# Allegro board 7_31EX.brd
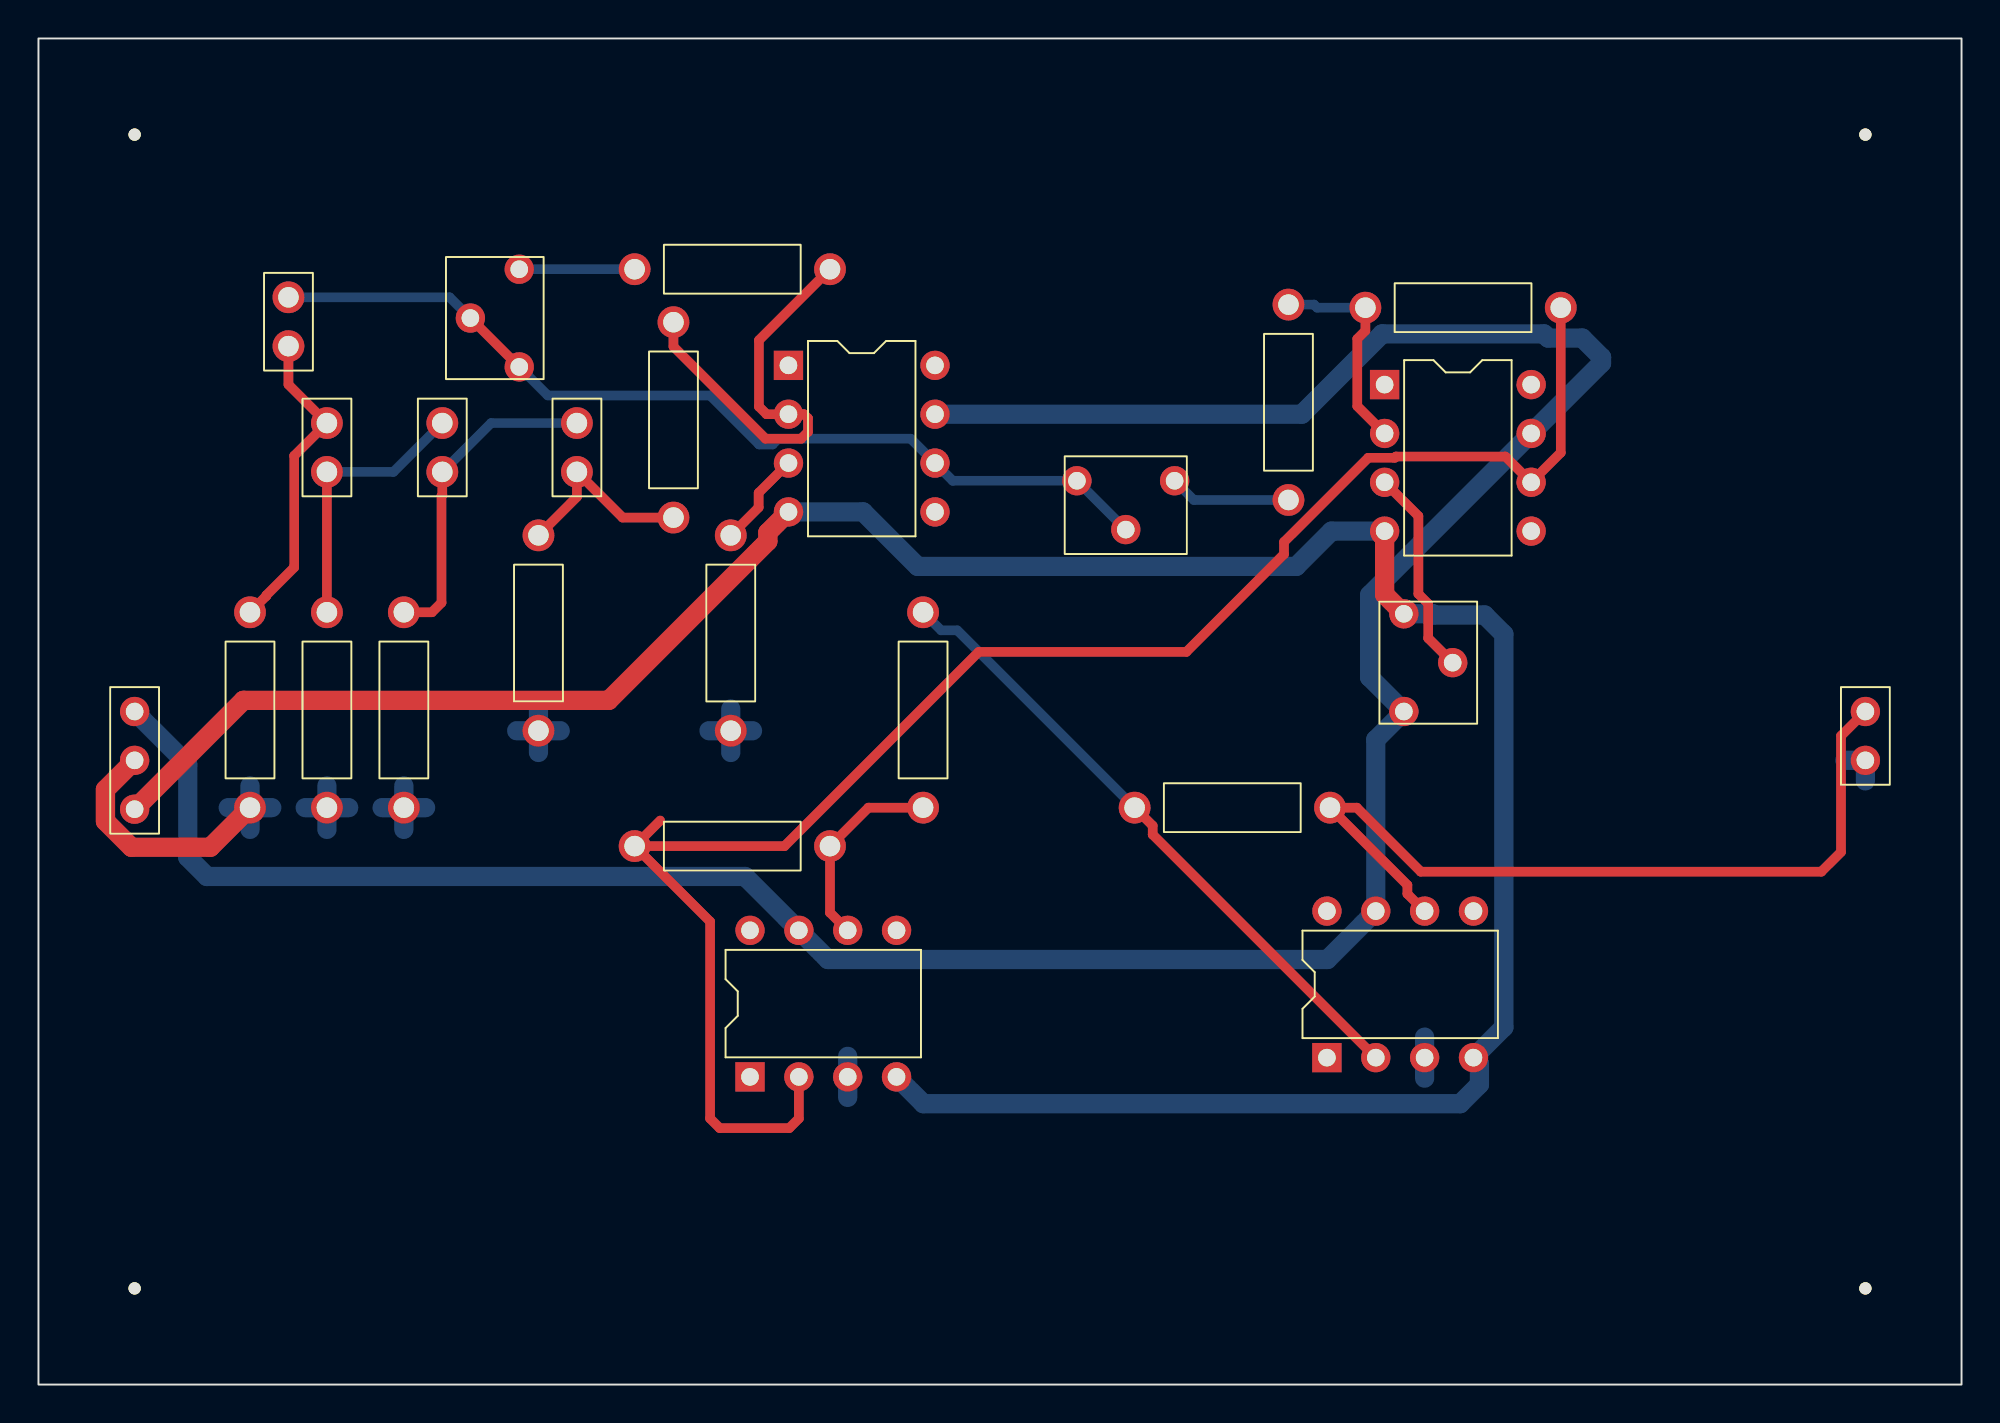
[diagram p0: board, top side]
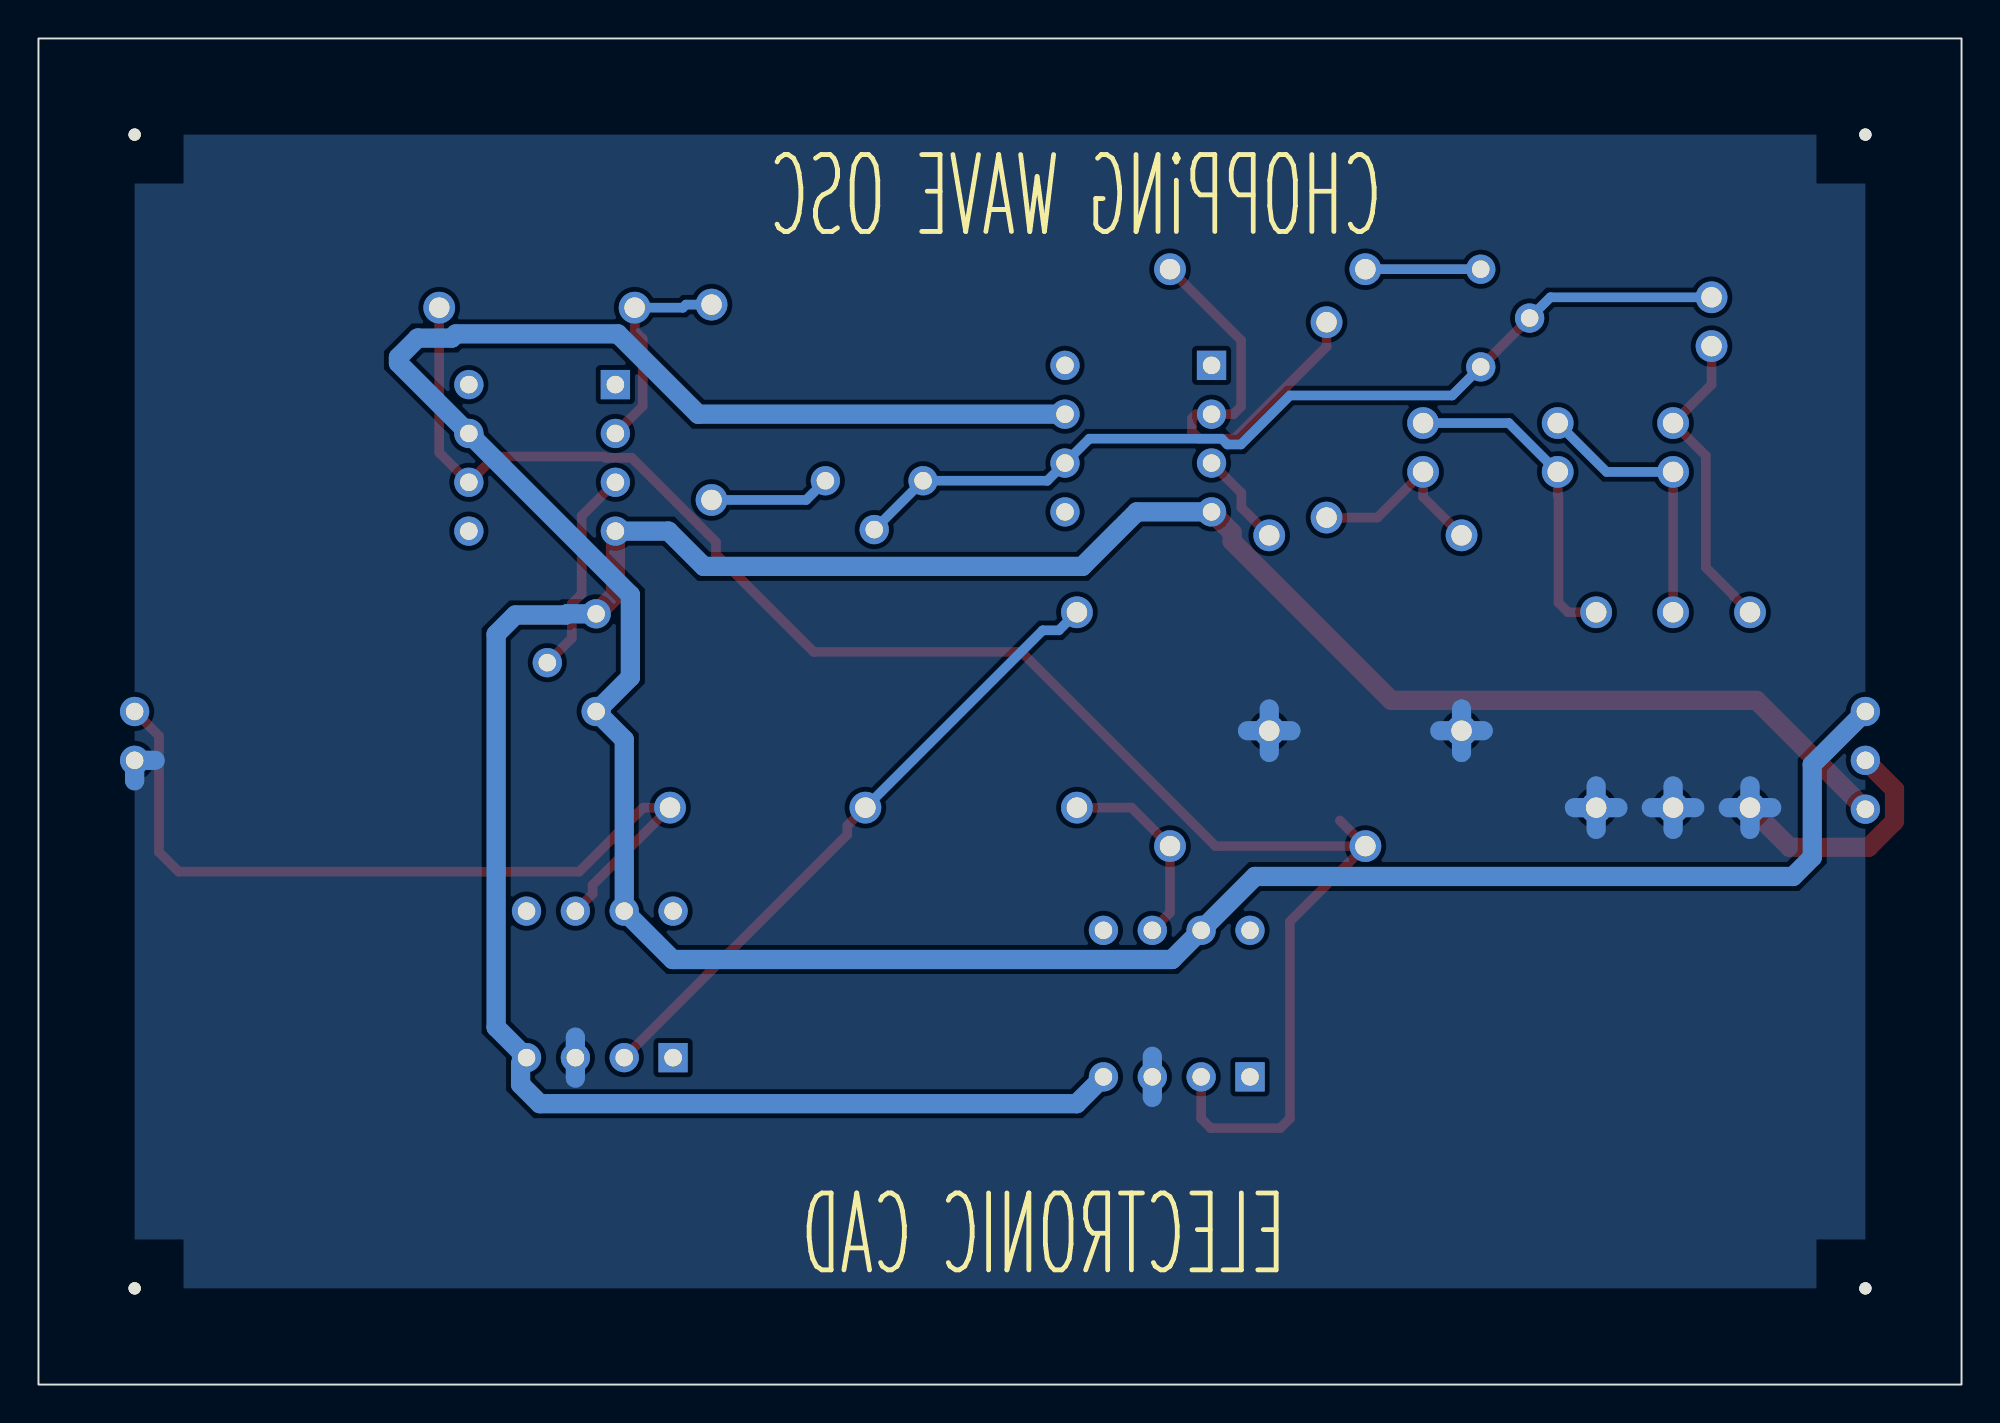
[diagram p1: board, bottom side, seen from below]

Outline 100 x 70 mm; copper layers: TOP, BOTTOM. Coordinates in mm from the lower left corner of the outline.
Outline path: rectangle 0,0 100,70

## Design rules (mm)
constraint set DEFAULT: min track width 0.5

## Placement (name value [footprint] x y rotation side)
C1  0.001uF  [CAPCK05]  13 54 0 top
C2  0.001uF  [CAPCK05]  15 50 180 top
C3  0.001uF  [CAPCK05]  21 50 180 top
C4  0.001uF  [CAPCK05]  28 50 180 top
J1  CON3  [JUMPER3]  5 35 270 top
J2  CON2  [JUMPER2]  95 35 270 top
NOREF  -  [unnamed]  5 5 0 top
NOREF#2  -  [unnamed]  95 65 0 top
NOREF#3  -  [unnamed]  5 65 0 top
NOREF#4  -  [unnamed]  95 5 0 top
R1  10K  [RES400]  69 56 270 top
R2  15K  [RES400]  31 58 270 top
R3  10K  [RES400]  33.02 45.09 0 top
R4  20K  [RES400]  65 46 0 top
R5  4.7K  [RES400]  11 30 0 top
R6  4.7K  [RES400]  15 30 0 top
R7  4.7K  [RES400]  19 30 0 top
R9  1K  [RES400]  36 34 0 top
R10  8.2K  [RES400]  31 28 270 top
R11  10K  [RES400]  57 30 270 top
R12  2.2K  [RES400]  46 30 0 top
R18  4.7K  [RES400]  26 34 0 top
U2  LF356  [DIP8_3]  70 52 0 top
U3  LF356  [DIP8_3]  37 16 90 top
U4  LF356  [DIP8_3]  67 17 90 top
U5  LF356  [DIP8_3]  39 53 0 top
VR1  470K  [RESADJ]  25 58 0 top
VR2  100K  [RESADJ]  54 47 90 top
VR3  10K  [RESADJ]  71 35 180 top

## Library data of the parts
C1-C4 = C: Tolerance: ***; User Part Number: ***
J1 = CON3_0: User Part Number: ***
J2 = CON2: User Part Number: ***
R1-R7 R9-R12 R18 = R: Tolerance: ***; User Part Number: ***
U2-U5 = LF356_0: Tolerance: ***; User Part Number: ***
VR1-VR3 = POT: Tolerance: ***; User Part Number: ***

## Footprints (pads in the part's own frame, mm; a bottom-side part is the same pattern mirrored in y, then rotated)
CAPCK05
  round 1.651 hole 1.067: 1(0,0) 2(0,2.54)
DIP8_3
  rect 1.524x1.524 hole 0.914: 1(0,0)
  round 1.524 hole 0.914: 2(0,-2.54) 3(0,-5.08) 4(0,-7.62) 5(7.62,-7.62) 6(7.62,-5.08) 7(7.62,-2.54) 8(7.62,0)
JUMPER2
  round 1.524 hole 0.914: 1(0,0) 2(2.54,0)
JUMPER3
  round 1.524 hole 0.914: 1(0,0) 2(2.54,0) 3(5.08,0)
RES400
  round 1.651 hole 1.067: 1(0,0) 2(0,10.16)
RESADJ
  round 1.524 hole 0.914: 1(0,0) 2(-2.54,-2.54) 3(0,-5.08)
unnamed
  round 0.635 hole 3.175 unplated: (0,0)

## Nets
+12V: J1.1 U2.7 U3.7 U4.7 U5.7 VR3.1
-12V: J1.3 U2.4(V-) U3.4(V-) U4.4(V-) U5.4(V-) VR3.3
GND: J1.2 J2.2 R5.1 R6.1 R7.1 R9.1 R18.1 U3.3 U4.3
OUT: J2.1 R11.2 U4.6
SIG: R1.2 R10.1 U2.6 U3.2
N00287: R10.2 R12.1 U3.6
N00691: R11.1 R12.2 U4.2
N01533: R1.1 R4.2 U2.2
N01615: U2.3 VR3.2(WIPER)
N02073: R4.1 VR2.3
N02205: R2.2 R3.2 U5.2
N02209: R9.2 U5.3
N02329: C1.2 U5.6 VR1.2(WIPER) VR1.3 VR2.1 VR2.2(WIPER)
N02554: C3.2 C4.1 R7.2
N02563: C2.2 C3.1 R6.2
N02579: C1.1 C2.1 R5.2
N02685: C4.2 R3.1 R18.2
N028140: R2.1 VR1.1

Pads without a net: U2 1 5 8; U3 1 5 8; U4 1 5 8; U5 1 5 8

## Routing (per net, layer and track width the routed paths; a pad name or vN(x,y) marks a point on that pad's centre or on a via; arc(x,y) is an arc through that point)
+12V: length 145.8
  BOTTOM w1: U5.7 65.69,50.46 69.87,54.64 78.29,54.64 78.51,54.42 80.28,54.42 81.28,53.42 81.28,53.12 U2.7 69.22,41.06 69.22,36.78 VR3.1 69.54,33.54 U4.7 67.02,22.1 41.06,22.1 U3.7 36.74,26.42 8.76,26.42 7.76,27.42 7.76,32.24 J1.1
-12V: length 139.5
  TOP w1: U2.4 70,41.08 VR3.3 ; U5.4 37.93,44.31 37.93,43.85 29.65,35.58 10.66,35.58 J1.3
  BOTTOM w1: U5.4 42.88,45.38 45.72,42.55 65.41,42.55 67.24,44.38 U2.4 ; U3.4 46.02,14.61 73.93,14.61 74.93,15.61 74.93,16.69 U4.4 76.2,18.58 76.2,39.02 75.2,40.02 72.58,40.02 72.52,40.08 VR3.3
GND: length 41.7
  TOP w1: R5.1 8.94,27.94 4.84,27.94 3.48,29.29 3.48,30.94 J1.2
  BOTTOM w1: 36,32.87 R9.1 ; R9.1 36,35.13 ; R9.1 34.87,34 ; R9.1 37.13,34 ; 72.08,18.07 U4.3 72.08,15.93 ; 95,31.39 J2.2 93.93,32.46 ; 19,28.87 R7.1 ; R7.1 19,31.13 ; R7.1 17.87,30 ; R7.1 20.13,30 ; 24.87,34 R18.1 ; R18.1 27.13,34 ; R18.1 26,35.13 ; R18.1 26,32.87 ; 15,28.87 R6.1 ; R6.1 15,31.13 ; R6.1 16.13,30 ; R6.1 13.87,30 ; R5.1 11,31.13 ; R5.1 12.13,30 ; R5.1 11,28.87 ; R5.1 9.87,30 ; 42.08,14.93 U3.3 42.08,17.07
OUT: length 43.6
  TOP w0.5: J2.1 93.73,33.73 93.73,27.69 92.71,26.67 71.88,26.67 68.55,30 R11.2 71.18,25.98 71.18,25.52 U4.6
SIG: length 91
  TOP w0.5: R1.2 79.16,48.46 U2.6 ; 32.33,29.33 R10.1 ; R10.1 34.92,24.07 34.92,13.84 35.42,13.34 39.04,13.34 39.54,13.84 U3.2 ; R10.1 38.8,28 48.9,38.1 59.69,38.1 64.77,43.18 64.77,43.81 69.15,48.19 70.52,48.19 70.59,48.26 76.28,48.26 U2.6 ; U2.6 77.12,46.92
N00287: length 10.4
  TOP w0.5: R12.1 43.16,30 R10.2 41.16,24.54 U3.6
N00691: length 33.4
  TOP w0.5: R11.1 57.94,29.06 57.94,28.6 U4.2
  BOTTOM w0.5: R11.1 47.78,39.22 46.94,39.22 R12.2
N01533: length 11.4
  TOP w0.5: U2.2 68.58,50.88 68.58,54.38 69,54.8 R1.1
  BOTTOM w0.5: R4.2 66.33,56.16 66.49,56 R1.1
N01615: length 10.8
  TOP w0.5: U2.3 71.75,45.16 71.75,41.12 72.27,40.6 72.27,38.81 VR3.2
N02073: length 6.3
  BOTTOM w0.5: R4.1 60.08,46 VR2.3
N02205: length 22.6
  TOP w0.5: R2.2 37.47,54.3 37.47,50.86 37.86,50.46 U5.2 39.8,50.46 40.01,50.25 40.01,49.54 39.66,49.19 37.81,49.19 33.02,53.98 33.02,55.24
N02209: length 5
  TOP w0.5: U5.3 37.45,46.37 37.45,45.61 R9.2
N02329: length 48.8
  TOP w0.5: VR1.2 VR1.3
  BOTTOM w0.5: VR1.3 26.48,51.44 34.92,51.44 37.47,48.89 38.18,48.89 38.48,49.19 45.35,49.19 U5.6 47.54,47 VR2.1 VR2.2 ; VR1.2 21.38,56.54 C1.2
N02554: length 17
  TOP w0.5: C3.2 21,46.26 20.96,46.22 20.96,40.66 20.46,40.16 R7.2
  BOTTOM w0.5: C3.2 23.54,50 C4.1
N02563: length 14.4
  TOP w0.5: C2.2 R6.2
  BOTTOM w0.5: C2.2 18.46,47.46 C3.1
N02579: length 16.3
  TOP w0.5: C1.1 13,52 C2.1 13.3,48.3 13.3,42.49 11.85,41.05 11.85,41.01 R5.2
N02685: length 10.1
  TOP w0.5: R3.1 30.38,45.09 C4.2 28,46.16 R18.2
N028140: length 6
  BOTTOM w0.5: VR1.1 R2.1

## Copper pours and planes (outline as drawn; the poured copper is in the pictures)
GND on BOTTOM: 95,65 95,5 5,5 5,65

## Text on the board
Ref Des/Silkscreen Bottom: CHOPPiNG WAVE OSC | ELECTRONIC CAD
COMPVAL_TYPE_TOP: FIGURE | FINISHED_SIZE | 0.914 | 1.067 | 3.175 | DRILL CHART: TOP to BOTTOM | ALL UNITS ARE IN MILLIMETERS | PLATED | NON-PLATED | QTY | 46 | 32 | 4
